# Altium PCB NewSpeedRadar_Board.PcbDoc (part 3 of 4)
Units mm, origin at the board's own origin, x right, y up, seen from the top; angles counter-clockwise.
Board outline 150 x 110 mm, 2 copper layers (Top Layer, Bottom Layer), stack 1.571 mm thick; 208 components, 164 nets, 788 pads, 782 vias.
Unrouted connection lines stored in the file: 231.
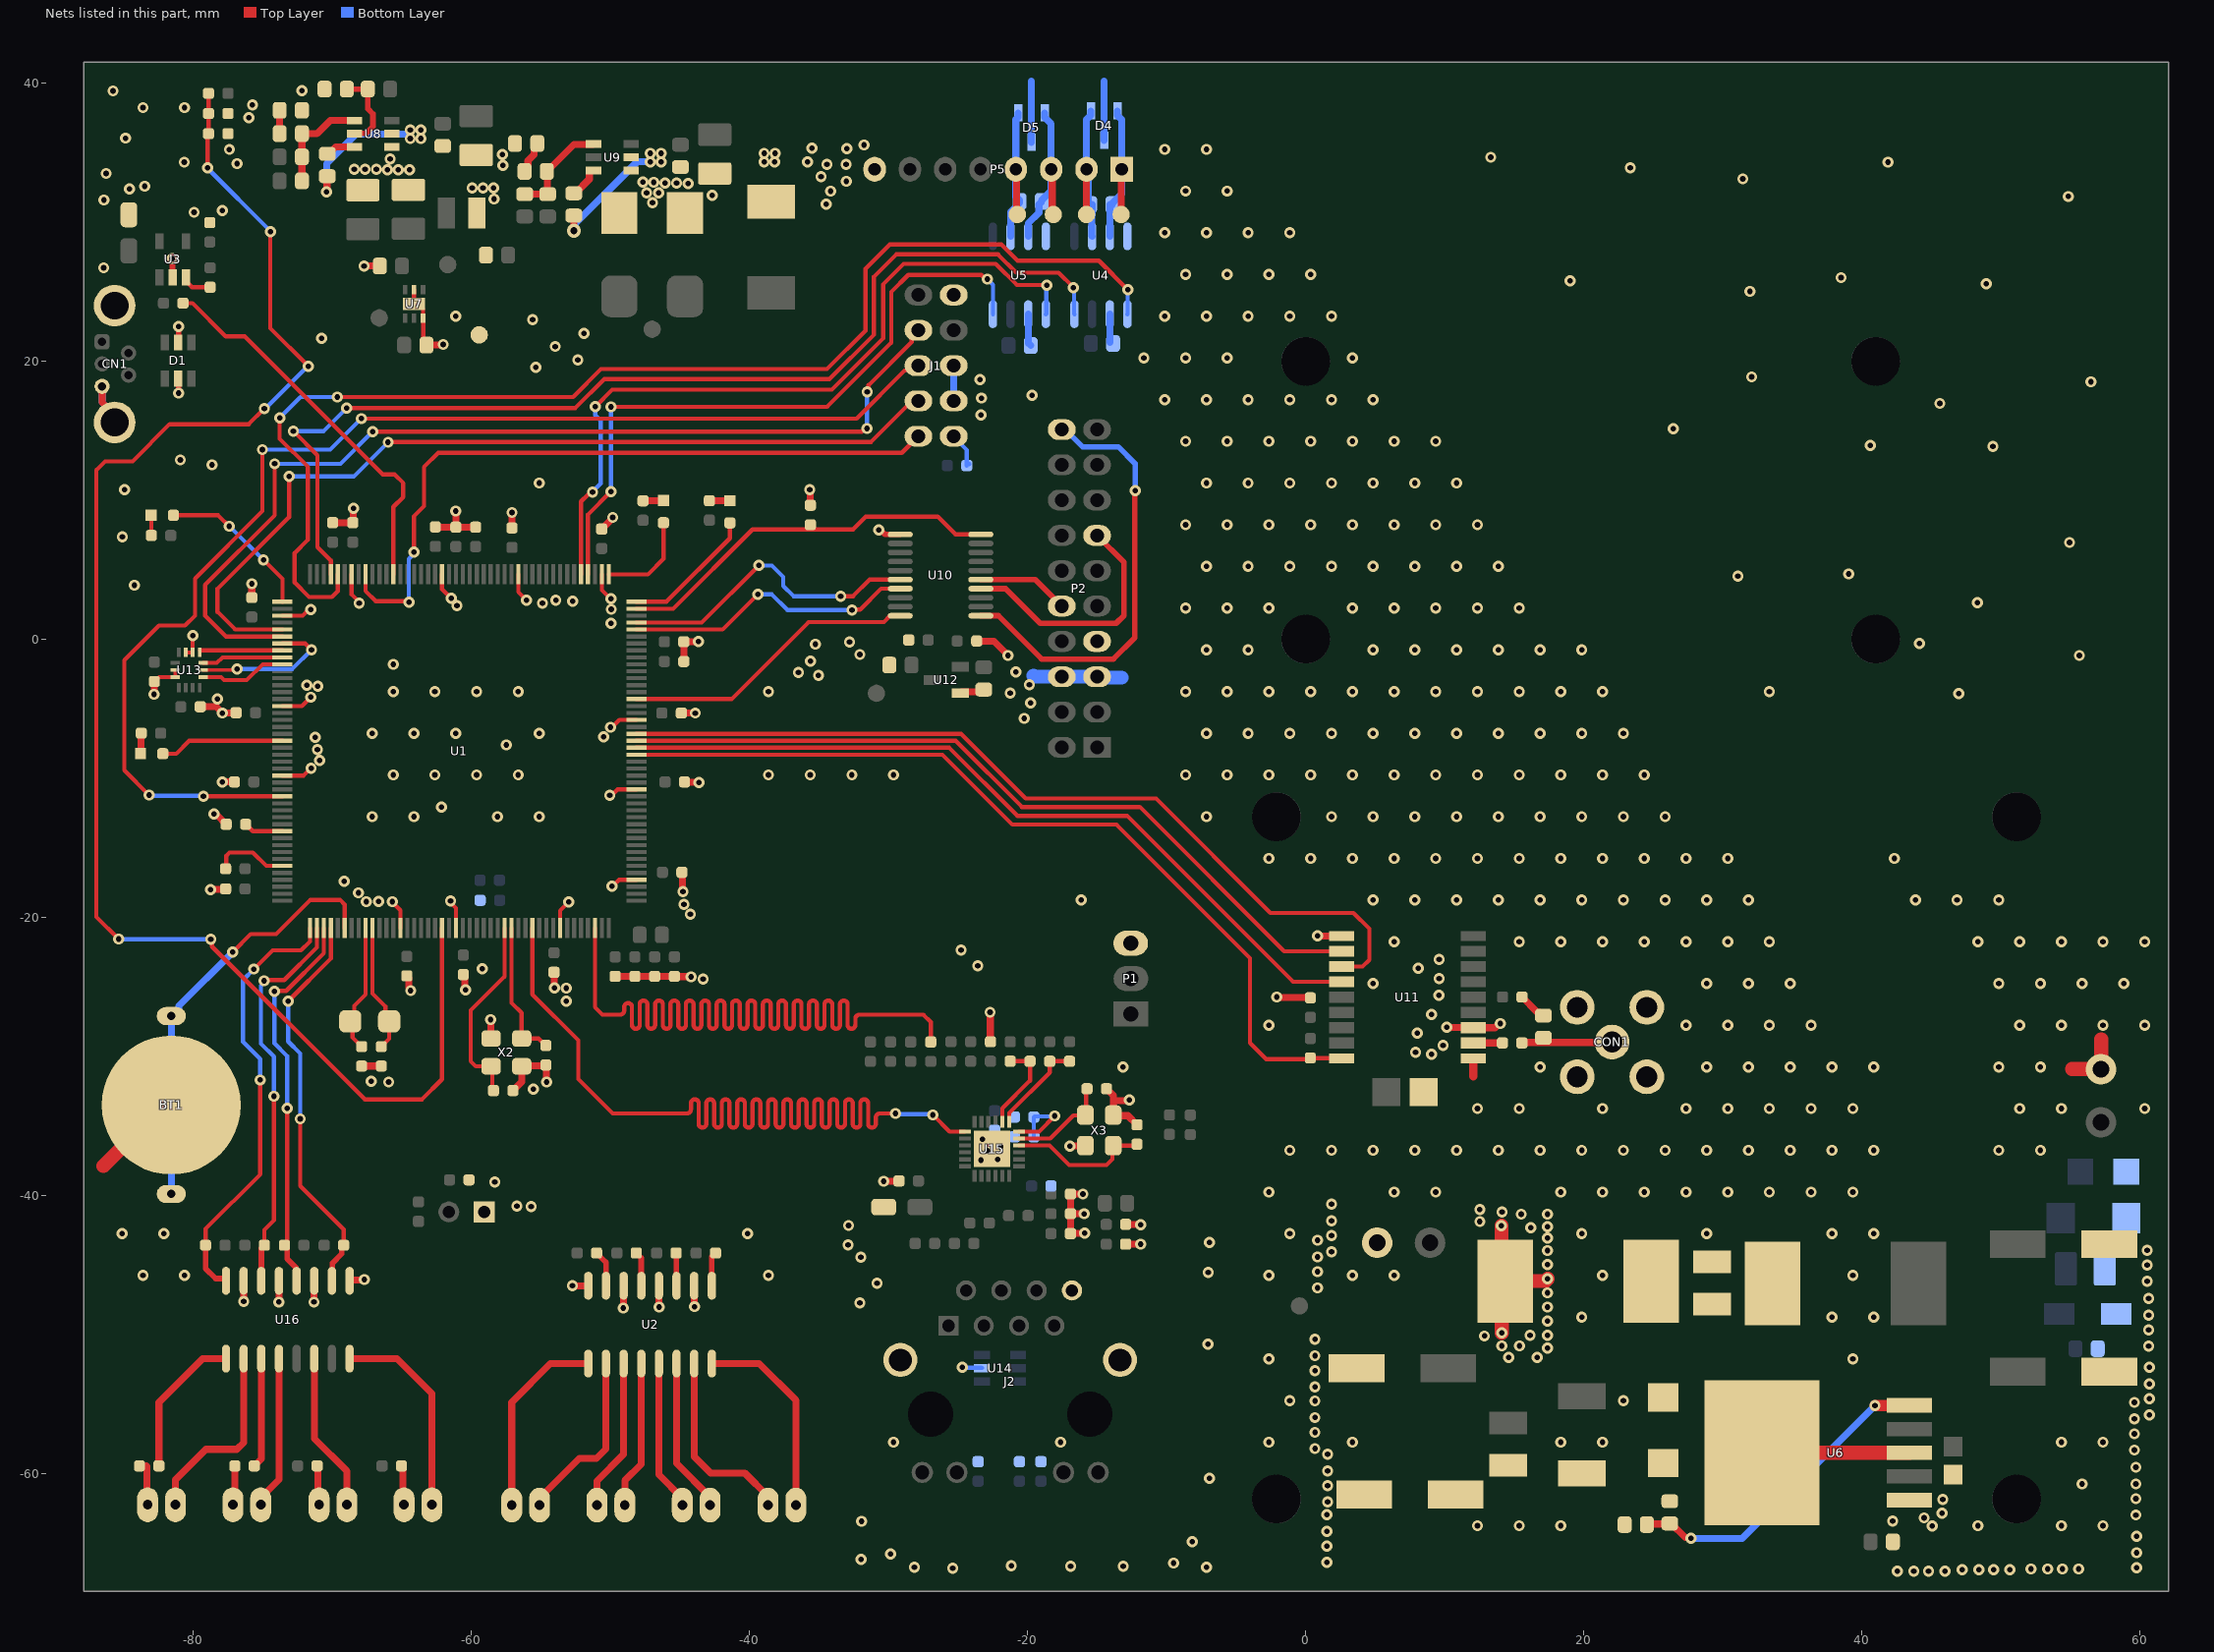
[diagram p2: the nets of this part, all layers, seen from the top]

## Via types
v1: diameter 0.8, hole 0.4, Top Layer to Bottom Layer, tented both sides, 480 vias
v2: diameter 0.8, hole 0.4, Top Layer to Bottom Layer, 288 vias
v3: diameter 1, hole 0.5, Top Layer to Bottom Layer, tented both sides, 14 vias

## Nets (pads, with @x,y where several pads share a name; then routed paths per layer and width w, separated by ;. In a path a pad name is that pad's centre, name@x,y a point inside that pad or via, vN(x,y) a via of type N, cw(c..) or ccw(c..) an arc to the next point about the centre after c; other vN are vias at no path point) (continued)
ADC_Vin: C63.2 R38.2 R39.2 U1.20 | length 115.2
  Top Layer w0.3: v1(-85.383,-21.567) -86.983,-19.967 -86.983,12.166 -86.349,12.799 -84.381,12.799 -81.714,15.466 -76.025,15.466 v1(-74.905,16.586) ; v1(-78.982,33.921) -78.982,36.308 C63.2@-78.92,36.37 R39.2@-78.92,37.818 R38.2@-78.92,39.266 ; v1(-78.753,-21.593) -78.668,-21.678 -78.668,-22.109 -67.679,-33.099 -63.564,-33.099 -62.122,-31.656 U1.20@-62.122,-20.779 ; v1(-74.473,29.312) -74.473,22.377 v1(-71.73,19.634)
  Bottom Layer w0.3: v1(-85.383,-21.567) -85.37,-21.58 -78.766,-21.58 v1(-78.753,-21.593) ; v1(-78.982,33.921) -78.982,33.871 -74.473,29.361 v1(-74.473,29.312) ; v1(-74.905,16.586) -74.841,16.586 -71.793,19.634 v1(-71.73,19.634)
BOOT0: R3.1 U1.166 | length 2.9
  Top Layer w0.3: R3.1@-76.25,-13.312 -76.223,-13.312 -75.73,-13.804 U1.166@-73.597,-13.804
CAN1_H: D4.2 P5.1 R18.2 TP6.1 U4.7 | length 13.5
  Top Layer w0.5: TP6.1@-13.272,30.554 -13.272,33.754 P5.1@-13.221,33.805
  Bottom Layer w0.5: U4.7@-14.085,28.982 -14.066,29.001 -14.066,31.094 R18.2@-13.894,31.265 -13.894,31.365 -13.221,32.038 P5.1@-13.221,33.805 -13.221,37.373 -13.541,37.693 D4.2@-13.541,38.008 ; -14.085,30.509 R18.2@-14.085,31.265
CAN1_L: D4.1 P5.2 R18.1 TP7.1 U4.6 | length 13.3
  Top Layer w0.5: TP7.1@-15.761,30.554 P5.2@-15.761,33.805
  Bottom Layer w0.5: D4.1@-15.441,38.008 -15.441,37.693 -15.761,37.373 P5.2@-15.761,33.805 -15.628,33.671 -15.628,31.398 R18.1@-15.494,31.265 -15.374,31.144 -15.374,29.001 U4.6@-15.355,28.982 ; -15.355,30.509 R18.1@-15.355,31.265
CAN1_RXD: U1.129 U4.4 | length 78.2
  Top Layer w0.3: v1(-72.822,14.971) -71.082,13.231 -71.082,6.627 -70.122,5.666 U1.129@-70.122,4.671 ; v1(-68.974,16.634) -52.53,16.634 -50.447,18.717 -34.252,18.717 -31.052,21.918 -31.052,26.083 -29.452,27.683 -22.124,27.683 -20.803,26.363 -17.768,26.363 v1(-16.701,25.296)
  Bottom Layer w0.3: v1(-72.822,14.971) -70.638,14.971 v1(-68.974,16.634) ; v1(-16.701,25.296) -16.663,25.258 -16.663,23.42 U4.4@-16.625,23.382
CAN1_TXD: U1.128 U4.1 | length 89.9
  Top Layer w0.3: v1(-73.8,15.923) -73.8,14.425 -71.768,12.393 -71.768,7.16 -72.734,6.194 -72.734,4.088 -71.692,3.045 -70.041,3.045 -69.622,3.465 U1.128@-69.622,4.671 ; v1(-69.66,17.422) -52.693,17.422 -50.686,19.428 -34.43,19.428 -31.662,22.197 -31.662,26.642 -29.909,28.395 -21.883,28.395 -20.714,27.226 -14.872,27.226 v1(-12.789,25.143)
  Bottom Layer w0.3: v1(-73.8,15.923) -72.302,17.422 v1(-69.66,17.422) ; U4.1@-12.815,23.382 -12.802,23.395 -12.802,25.131 v1(-12.789,25.143)
CAN2_H: D5.2 P5.3 R22.2 TP8.1 U5.7 | length 13.1
  Top Layer w0.5: P5.3@-18.301,33.805 -18.225,33.729 -18.225,30.63 TP8.1@-18.149,30.554
  Bottom Layer w0.5: U5.7@-19.952,28.985 -19.933,29.004 -19.933,29.938 -19.183,30.688 -19.183,31.285 R22.2@-18.974,31.493 -18.974,31.593 -18.301,32.267 P5.3@-18.301,33.805 -18.301,37.075 -18.774,37.547 D5.2@-18.774,37.862
CAN2_L: D5.1 P5.4 R22.1 TP9.1 U5.6 | length 12.6
  Top Layer w0.5: P5.4@-20.841,33.805 -20.79,33.754 -20.79,30.604 TP9.1@-20.74,30.554
  Bottom Layer w0.5: U5.6@-21.222,28.985 -21.222,30.746 -20.574,31.393 R22.1@-20.574,31.493 -20.574,31.593 -20.841,31.86 P5.4@-20.841,33.805 -20.841,37.379 -20.674,37.547 D5.1@-20.674,37.862
CAN2_RXD: U1.92 U5.4 | length 48.7
  Top Layer w0.3: U1.92@-51.622,4.671 -51.622,8.968 v1(-49.975,10.615) ; v1(-49.975,16.719) -34.422,16.719 -29.807,21.333 -29.807,24.991 -28.588,26.21 -23.324,26.21 -23.019,25.905 v1(-22.899,25.905)
  Bottom Layer w0.3: v1(-49.975,10.615) v1(-49.975,16.719) ; v1(-22.899,25.905) -22.492,25.499 U5.4@-22.492,23.382
CAN2_TXD: U1.93 U5.1 | length 54.7
  Top Layer w0.3: U1.93@-52.122,4.671 -52.122,9.912 -51.909,10.124 -51.896,10.124 -51.431,10.589 v1(-51.296,10.589) ; v1(-51.093,16.736) -49.873,17.955 -34.075,17.955 -30.392,21.638 -30.392,25.524 -28.918,26.998 -22.289,26.998 -20.765,25.474 v1(-18.606,25.474)
  Bottom Layer w0.3: v1(-51.296,10.589) -51.296,10.623 -50.712,11.207 -50.712,15.736 -51.093,16.117 v1(-51.093,16.736) ; U5.1@-18.682,23.382 -18.644,23.42 -18.644,25.436 v1(-18.606,25.474)
ETH_MDC: U1.33 U15.13 | length 84.4
  Top Layer w0.3: U1.33@-55.622,-20.779 -55.622,-25.547 -52.324,-28.844 -52.324,-31.638 -49.848,-34.115 -45.86,-34.115 -44.514,-34.115 ccw(c-44.514,-33.815) -44.214,-33.815 -44.214,-33.376 cw(c-43.937,-33.376) -43.66,-33.376 -43.66,-34.854 ccw(c-43.383,-34.854) -43.106,-34.854 -43.106,-33.376 cw(c-42.829,-33.376) -42.552,-33.376 -42.552,-34.854 ccw(c-42.275,-34.854) -41.998,-34.854 -41.998,-33.376 cw(c-41.721,-33.376) -41.444,-33.376 -41.444,-34.854 ccw(c-41.167,-34.854) -40.89,-34.854 -40.89,-33.376 cw(c-40.613,-33.376) -40.336,-33.376 -40.336,-34.854 ccw(c-40.059,-34.854) -39.782,-34.854 -39.782,-33.376 cw(c-39.505,-33.376) -39.228,-33.376 -39.228,-34.854 ccw(c-38.951,-34.854) -38.674,-34.854 -38.674,-33.376 cw(c-38.397,-33.376) -38.12,-33.376 -38.12,-34.854 ccw(c-37.843,-34.854) -37.566,-34.854 -37.566,-33.376 cw(c-37.289,-33.376) -37.012,-33.376 -37.012,-34.854 ccw(c-36.735,-34.854) -36.458,-34.854 -36.458,-33.376 cw(c-36.181,-33.376) -35.904,-33.376 -35.904,-34.854 ccw(c-35.627,-34.854) -35.35,-34.854 -35.35,-33.376 cw(c-35.073,-33.376) -34.796,-33.376 -34.796,-34.854 ccw(c-34.519,-34.854) -34.242,-34.854 -34.242,-33.376 cw(c-33.965,-33.376) -33.688,-33.376 -33.688,-34.854 ccw(c-33.411,-34.854) -33.134,-34.854 -33.134,-33.376 cw(c-32.857,-33.376) -32.58,-33.376 -32.58,-34.854 ccw(c-32.303,-34.854) -32.026,-34.854 -32.026,-33.376 cw(c-31.749,-33.376) -31.472,-33.376 -31.472,-34.854 ccw(c-31.195,-34.854) -30.918,-34.854 -30.918,-34.415 cw(c-30.618,-34.415) -30.618,-34.115 -30.468,-34.115 v1(-29.503,-34.115) ; v1(-26.81,-34.216) -25.616,-35.411 U15.13@-24.514,-35.411
  Bottom Layer w0.3: v1@-29.503,-34.166 -26.861,-34.166 v1(-26.81,-34.216)
ETH_MDIO: R57.2 U1.42 | length 84.9
  Top Layer w0.3: U1.42@-51.122,-20.779 -51.122,-26.466 -50.585,-27.003 -49.311,-27.003 ccw(c-49.311,-26.703) -49.011,-26.703 -49.011,-26.453 cw(c-48.734,-26.453) -48.457,-26.453 -48.457,-27.742 ccw(c-48.18,-27.742) -47.903,-27.742 -47.903,-26.264 cw(c-47.626,-26.264) -47.349,-26.264 -47.349,-27.742 ccw(c-47.072,-27.742) -46.795,-27.742 -46.795,-26.264 cw(c-46.518,-26.264) -46.241,-26.264 -46.241,-27.742 ccw(c-45.964,-27.742) -45.687,-27.742 -45.687,-26.264 cw(c-45.41,-26.264) -45.133,-26.264 -45.133,-27.742 ccw(c-44.856,-27.742) -44.579,-27.742 -44.579,-26.264 cw(c-44.302,-26.264) -44.025,-26.264 -44.025,-27.742 ccw(c-43.748,-27.742) -43.471,-27.742 -43.471,-26.264 cw(c-43.194,-26.264) -42.917,-26.264 -42.917,-27.742 ccw(c-42.64,-27.742) -42.363,-27.742 -42.363,-26.264 cw(c-42.086,-26.264) -41.809,-26.264 -41.809,-27.742 ccw(c-41.532,-27.742) -41.255,-27.742 -41.255,-26.264 cw(c-40.978,-26.264) -40.701,-26.264 -40.701,-27.742 ccw(c-40.424,-27.742) -40.147,-27.742 -40.147,-26.264 cw(c-39.87,-26.264) -39.593,-26.264 -39.593,-27.742 ccw(c-39.316,-27.742) -39.039,-27.742 -39.039,-26.264 cw(c-38.762,-26.264) -38.485,-26.264 -38.485,-27.742 ccw(c-38.208,-27.742) -37.931,-27.742 -37.931,-26.264 cw(c-37.654,-26.264) -37.377,-26.264 -37.377,-27.742 ccw(c-37.1,-27.742) -36.823,-27.742 -36.823,-26.264 cw(c-36.546,-26.264) -36.269,-26.264 -36.269,-27.742 ccw(c-35.992,-27.742) -35.715,-27.742 -35.715,-26.264 cw(c-35.438,-26.264) -35.161,-26.264 -35.161,-27.742 ccw(c-34.884,-27.742) -34.607,-27.742 -34.607,-26.264 cw(c-34.33,-26.264) -34.053,-26.264 -34.053,-27.742 ccw(c-33.776,-27.742) -33.499,-27.742 -33.499,-26.264 cw(c-33.222,-26.264) -32.945,-26.264 -32.945,-27.742 ccw(c-32.668,-27.742) -32.391,-27.742 -32.391,-27.303 cw(c-32.091,-27.303) -32.091,-27.003 -31.941,-27.003 -27.496,-27.003 -26.963,-27.536 R57.2@-26.963,-28.97
GND: BT1.2 C1.2 C2.2 C3.2 C4.1 C5.1 C6.2 C7.2 C8.1 C9.1 C10.1 C11.1 C12.1 C13.1 C14.2 C15.2 C16.2 C17.2 C18.2 C19.2 C20.2 C21.2 C22.2 C23.2 C24.2 C25.2 C26.2 C27.2 C28.2 C29.2 C30.1 C31.1 C32.1 C35.2 C36.2 C37.2 C38.1 C39.1 C41.1 C42.1 C43.1 C44.1 C45.1 C46.1 C47.2 C50.1 C51.1 C52.2 C54.2 C55.2 C56.2 C58.2 C59.2 C60.1 C61.1 C62.1 C63.1 C64.1 C65.1 C66.1 C67.1 C68.1 C69.1 C70.1 C71.1 C72.2 C73.2 C74.2 C75.1 C76.1 C77.2 CN1.5 CN1.Shell CON1.2 CON1.3 CON1.4 CON1.5 D1.2 D1.5 D3.2 D4.3 D5.3 GND.1 J1.3 J1.5 J1.9 J2.8 J2.13 J2.14 L4.2 NTC1.1 P1.3 P2.5 P2.6 P3.2 P5.8 P6.2 R3.2 R5.2 R13.2 R15.2 R19.2 R20.2 R24.2 R30.2 R39.1 R41.1 R42.1 R43.1 R53.2 R54.2 R58.2 U1.14 U1.22 U1.37 U1.48 U1.61 U1.71 U1.90 U1.102 U1.113 U1.126 U1.135 U1.148 U1.158 U2.2 U2.4 U2.6 U2.8 U3.2 U4.2 U4.8 U5.2 U5.8 U6.1 U7.3 U7.5 U7.7 U8.1 U9.1 U10.11 U11.1 U11.10 U11.12 U12.1 U13.2 U13.3 U13.6 U13.7 U14.2 U15.25 U16.9 U16.11 U16.13 U16.15 X2.2 X2.4 X3.2 X3.4 | length 178.1
  Top Layer w0.28: C65.1@-82.817,-3.039 -82.785,-3.039 -82.458,-2.712 U13.7@-81.315,-2.712 U13.6@-81.315,-2.212 ; U13.3@-80.552,-0.95 U13.2@-80.053,-0.95 -80.053,0.247 v1(-80.049,0.251) ; v1@-71.706,2.131 v1(-71.565,2.131) ; v1(-68.085,2.588) v1@-68.085,2.675 ; v1(-56.046,2.817) v1@-56.046,2.825 ; v1(-50.051,-11.229) v1@-49.91,-11.229 ; v1(-50,-6.327) v1@-49.886,-6.327 ; v1(-49.899,-17.757) v1@-49.834,-17.757
  Top Layer w0.3: U1.158@-73.597,-9.804 -72.07,-9.804 v1(-71.54,-9.274) ; U1.148@-73.597,-4.804 -72.201,-4.804 v1(-71.565,-4.168) ; U1.135@-73.597,1.696 -72.141,1.696 v1@-71.706,2.131 ; U1.126@-68.622,4.671 -68.622,3.212 v1@-68.085,2.675 ; v1(-65.698,-18.875) -65.698,-18.925 -65.122,-19.501 U1.14@-65.122,-20.779 ; U7.5@-64.138,25.143 U7.7@-64.138,24.118 -63.838,24.118 -63.488,23.768 U7.3@-63.488,23.093 -63.478,23.083 -63.478,21.387 C41.1@-63.247,21.156 ; U1.113@-62.122,4.671 -62.122,3.61 v1(-61.456,2.944) ; v1(-61.507,-18.824) -61.507,-18.959 -61.122,-19.344 U1.22@-61.122,-20.779 ; U1.102@-56.622,4.671 -56.622,3.401 v1@-56.046,2.825 ; U1.37@-53.622,-20.779 -53.622,-19.524 v1(-52.998,-18.9) ; U1.90@-50.622,4.671 -50.622,3.526 -50.014,2.918 v1(-49.975,2.918) ; v1@-49.91,-11.229 -49.485,-10.804 U1.61@-48.147,-10.804 ; v1@-49.886,-6.327 -49.363,-5.804 U1.71@-48.147,-5.804 ; v1@-49.834,-17.757 -49.381,-17.304 U1.48@-48.147,-17.304
  Top Layer w0.4: v1(-81.522,27.379) -81.509,27.366 -81.509,26.045 U3.2@-81.496,26.032 ; D1.2@-81.1,18.743 -81.082,18.725 -81.082,17.719 v1(-81.065,17.701) ; D1.5@-81.1,21.343 -81.082,21.36 -81.082,22.484 v1(-81.065,22.502) ; v1@-77.966,30.836 v1(-77.927,30.836) ; v1(-30.696,7.871) -30.588,7.871 -30.255,7.538 U10.11@-29.162,7.538
  Top Layer w0.5: CN1.5@-86.57,18.197 -86.57,17.045 -85.67,16.145 CN1.Shell@-85.67,15.597 ; v1(-82.843,-3.965) -82.83,-3.952 -82.83,-3.052 C65.1@-82.817,-3.039 ; C64.1@-79.512,-4.854 -78.372,-4.854 v1(-77.915,-5.311) -77.902,-5.298 -76.951,-5.298 C25.2@-76.939,-5.286 ; v1(-78.779,-18.011) -78.753,-17.986 -77.715,-17.986 C24.2@-77.689,-17.96 ; v1(-78.525,-12.576) -78.467,-12.633 -78.329,-12.633 R3.2@-77.65,-13.312 ; v1(-77.915,-10.264) C23.2@-77.054,-10.264 ; v1(-76.391,-47.628) U16.15@-76.391,-46.148 ; C26.2@-75.807,2.998 v1(-75.807,3.985) ; v1(-73.851,-47.678) U16.13@-73.851,-46.148 ; v1(-71.336,-47.678) -71.324,-47.666 -71.324,-46.161 U16.11@-71.311,-46.148 ; C27.2@-69.99,8.382 C2.2@-68.542,8.382 -68.517,8.408 -68.517,9.395 v1(-68.492,9.421) ; U16.9@-68.771,-46.148 -68.771,-46.147 -68.725,-46.101 -67.752,-46.101 v1(-67.704,-46.053) ; C1.2@-67.907,-30.7 C3.2@-66.485,-30.7 ; v1(-67.73,26.845) C42.1@-66.599,26.845 ; v1@-66.021,-31.794 v1(-65.964,-31.852) ; C28.2@-64.656,-24.212 -64.506,-24.362 -64.506,-25.065 -64.377,-25.194 v1(-64.377,-25.276) ; C41.1@-63.247,21.156 -63.221,21.181 -62.065,21.181 v1(-62.04,21.206) ; C17.2@-62.599,8.078 -62.592,8.071 C4.1@-61.126,8.071 ; C4.1@-61.126,8.063 C4.1@-61.126,8.071 ; v1(-61.126,9.218) C4.1@-61.126,8.071 ; C19.2@-60.592,-24.121 -60.497,-24.216 -60.497,-25.167 v1(-60.44,-25.225) ; C5.1@-59.703,8.063 -59.71,8.071 C4.1@-61.126,8.071 ; R24.2@-58.966,27.963 R24.2@-58.852,27.963 ; v1(-58.636,-27.358) -58.615,-27.38 -58.615,-28.699 X2.4@-58.593,-28.721 ; C18.2@-57.087,8.001 v1(-57.087,9.116) ; C6.2@-57.022,-32.464 -56.393,-31.835 X2.2@-56.393,-30.721 -56.345,-30.672 -54.697,-30.672 C7.2@-54.649,-30.624 -54.623,-30.649 -54.623,-31.829 v1(-54.598,-31.854) ; C14.2@-54.064,-23.955 -54.052,-23.967 -54.052,-25.06 v1(-54.039,-25.072) ; v1(-52.744,-46.51) -52.741,-46.507 -51.604,-46.507 U2.8@-51.601,-46.504 ; C16.2@-50.635,7.925 -49.848,8.713 v1(-49.848,8.76) ; C8.1@-49.67,-24.248 C9.1@-48.248,-24.248 C11.1@-46.825,-24.248 C10.1@-45.403,-24.248 -45.385,-24.267 -44.227,-24.267 v1(-44.209,-24.285) ; v1(-49.086,-48.11) -49.073,-48.097 -49.073,-46.517 U2.6@-49.061,-46.504 ; U2.4@-46.521,-46.504 -46.508,-46.517 -46.508,-48.021 v1(-46.495,-48.034) ; C15.2@-44.906,-5.311 v1(-43.904,-5.311) ; C20.2@-44.867,-16.767 -44.83,-16.803 -44.83,-18.127 v1(-44.793,-18.164) ; C12.1@-44.728,-1.603 C22.2@-44.728,-0.18 -44.716,-0.168 -43.688,-0.168 v1(-43.676,-0.155) ; C21.2@-44.678,-10.264 -44.652,-10.29 -43.676,-10.29 v1(-43.65,-10.315) ; U2.2@-43.981,-46.504 -43.968,-46.517 -43.968,-47.996 v1(-43.955,-48.009) ; v1(-35.675,10.767) -35.649,10.742 -35.649,9.664 R41.1@-35.624,9.638 ; v1(-30.341,-38.992) -30.328,-38.979 -29.261,-38.979 C70.1@-29.249,-38.966 ; U12.1@-24.845,-3.874 -24.745,-3.774 -23.304,-3.774 C60.1@-23.165,-3.635 ; C58.2@-23.661,-0.13 -23.536,-0.13 -23.511,-0.155 -22.416,-0.155 v1(-21.4,-1.171) ; v1(-22.695,-26.825) -22.683,-26.838 -22.683,-28.943 R53.2@-22.67,-28.956 ; v1(-16.955,-36.452) -16.942,-36.439 -15.85,-36.439 X3.2@-15.837,-36.426 ; v1(-16.015,-39.906) C71.1@-16.915,-39.906 C76.1@-16.915,-41.328 ; v1(-15.939,-41.328) C76.1@-16.915,-41.328 ; v1(-15.888,-42.725) -15.901,-42.738 -16.903,-42.738 C75.1@-16.915,-42.751 C76.1@-16.915,-41.328 ; C77.2@-14.325,-32.337 -13.837,-32.824 -13.837,-33.2 ; C67.1@-12.94,-43.513 v1(-11.875,-43.513) ; C66.1@-12.94,-42.09 -12.928,-42.103 -11.888,-42.103 v1(-11.875,-42.116) ; v1(-12.688,-33.15) -12.739,-33.2 -13.837,-33.2 ; C73.2@-12.129,-34.925 -12.784,-34.269 -13.794,-34.269 X3.4@-13.837,-34.226 -13.837,-33.2 ; v1(-2.072,-25.734) -2.041,-25.765 0.31,-25.765 C56.2@0.341,-25.796 ; v1(0.849,-21.34) 0.851,-21.342 2.574,-21.342 U11.1@2.576,-21.344 ; v1(10.145,-27.919) 10.158,-27.931 12.063,-27.931 U11.12@12.076,-27.944 13.62,-27.944 13.925,-27.639 v1(14.006,-27.639)
  Top Layer w0.6: 12.05,-31.449 12.076,-31.424 U11.10@12.076,-30.144
  Top Layer w1: -86.475,-37.899 -82.081,-33.505 BT1.2@-81.598,-33.505 ; v1(14.084,-42.192) 14.084,-45.91 L4.2@14.353,-46.18 14.109,-46.424 v1(14.109,-49.888) ; L4.2@15.073,-46.154 17.259,-46.154 v1(17.411,-46.002) ; 55.129,-30.914 P3.2@57.211,-30.914 ; P3.2@57.211,-30.94 57.237,-30.914 57.237,-28.781
  Bottom Layer w0.3: v1(-24.704,-52.366) -24.673,-52.397 -23.315,-52.397 U14.2@-23.284,-52.428
  Bottom Layer w0.5: CN1.5@-86.57,18.197 -86.57,17.045 -85.67,16.145 CN1.Shell@-85.67,15.597 ; J1.3@-25.312,17.142 J1.5@-25.312,19.682 ; U5.2@-19.952,23.385 -19.933,23.366 -19.933,21.289 C39.1@-19.775,21.13 ; D5.3@-19.724,35.742 -19.724,40.155 ; D4.3@-14.491,35.888 -14.491,40.129 ; U4.2@-14.085,23.382 -14.066,23.363 C32.1@-14.066,21.352
  Bottom Layer w1: -19.571,-2.619 -19.495,-2.695 P2.6@-17.539,-2.695 P2.5@-14.999,-2.695 -14.923,-2.771 -13.247,-2.771
  other v1: 42.556,-67.033 43.749,-67.033 44.816,-67.033 45.985,-67.033 47.229,-66.932 48.423,-66.932 49.49,-66.932 50.658,-66.932 52.182,-66.881 53.376,-66.881 54.443,-66.881 55.611,-66.881 -25.389,-66.83 59.777,-66.779 -16.906,-66.678 -13.121,-66.678 -21.173,-66.652 -9.489,-66.449 1.535,-66.398 -31.968,-66.195 -29.86,-65.789 59.777,-65.712 1.535,-65.23 -8.143,-64.925 59.777,-64.519 1.535,-64.163 45.072,-63.782 -31.943,-63.452 42.227,-63.426 44.488,-63.198 59.726,-62.995 1.535,-62.969 45.783,-62.868 1.585,-62.055 45.834,-61.877 59.726,-61.826 1.585,-60.886 59.726,-60.759 -6.924,-60.353 1.585,-59.82 59.726,-59.566 1.585,-58.626 59.624,-58.321 0.671,-58.219 59.624,-57.153 0.671,-57.051 59.624,-56.086 0.671,-55.984 60.691,-55.806 59.624,-54.892 0.671,-54.79 60.691,-54.638 0.671,-53.774 60.691,-53.571 0.671,-52.606 60.691,-52.377 14.617,-51.666 16.649,-51.666 0.671,-51.539 17.41,-50.98 60.64,-50.853 14.109,-50.828 15.379,-50.828 -7.025,-50.701 0.671,-50.345 12.865,-50.117 16.141,-50.066 17.411,-50.066 60.64,-49.685 17.411,-49.05 60.64,-48.618 17.411,-48.034 -32.07,-47.729 60.64,-47.424 17.411,-47.018 0.849,-46.662 -30.825,-46.332 60.539,-46.18 -7,-45.545 0.849,-45.494 60.539,-45.011 17.411,-44.986 -31.993,-44.453 0.849,-44.427 1.865,-44.072 17.411,-43.97 60.539,-43.945 -32.908,-43.564 -6.924,-43.386 0.849,-43.233 17.411,-43.081 1.865,-42.903 16.192,-42.319 17.411,-42.268 -32.882,-42.167 12.534,-41.887 1.865,-41.836 15.506,-41.354 17.41,-41.354 14.135,-41.201 12.534,-41.024 -55.715,-40.82 -56.731,-40.77 1.865,-40.643 -58.332,-39.042 -23.356,-37.468 -22.162,-37.417 -22.899,-36.782 -21.959,-36.502 -23.254,-35.969 -55.55,-32.36 -67.208,-31.801 9.053,-29.849 7.91,-29.722 9.891,-29.214 8.037,-28.325 9.053,-26.979 -53.175,-26.038 9.586,-25.607 -53.175,-25.098 -43.346,-24.437 9.612,-24.414 -59.221,-23.701 8.113,-23.677 -23.586,-23.498 9.612,-23.042 -24.78,-22.355 -44.26,-19.789 -44.717,-19.078 -67.577,-18.875 -66.688,-18.849 -68.136,-18.24 -69.152,-17.402 -62.167,-12.068 -70.93,-8.715 -71.082,-7.927 -57.493,-7.597 -71.235,-7.064 -50.508,-7.013 -20.232,-5.692 -19.774,-4.575 -78.283,-4.293 46.975,-3.914 -21.248,-3.863 -71.057,-3.381 -71.844,-3.305 -19.876,-3.279 -35.04,-2.593 -36.488,-2.39 -20.841,-2.365 -65.621,-1.806 -35.624,-1.577 55.662,-1.171 -32.068,-1.095 -35.268,-0.358 44.156,-0.307 -32.805,-0.206 -49.975,1.14 -49.95,2.156 -61.049,2.41 -54.903,2.588 48.321,2.639 -52.718,2.741 -53.937,2.817 -84.252,3.886 31.1,4.544 39.076,4.696 54.951,6.957 -85.115,7.366 -84.963,10.77 -78.664,12.548 -80.95,12.903 49.439,13.866 40.625,13.942 26.452,15.136 -23.357,16.126 45.629,16.965 -23.307,17.346 -19.674,17.549 56.5,18.514 -23.434,18.666 32.091,18.87 -55.372,19.558 -52.349,20.091 -53.975,21.057 -70.79,21.641 -51.918,21.996 -55.601,22.987 31.964,25.016 48.956,25.575 19.035,25.778 38.517,26.007 -86.462,26.721 -79.959,30.709 -34.481,31.29 -46.978,31.392 -86.436,31.598 54.875,31.849 -42.685,31.925 -47.41,32.103 -46.546,32.103 -34.176,32.23 -84.597,32.382 -83.505,32.586 -44.412,32.789 -46.089,32.814 -45.251,32.814 -46.902,32.865 -47.664,32.89 -33.033,32.941 31.456,33.119 -34.862,33.271 -86.284,33.503 -66.053,33.779 -65.266,33.779 -64.453,33.779 -68.441,33.805 -67.653,33.805 -66.841,33.805 23.353,33.906 -57.747,34.084 -34.43,34.16 -33.059,34.16 -76.86,34.214 -80.67,34.315 41.895,34.313 -35.827,34.338 -65.85,34.541 13.32,34.668 -57.773,34.872 -77.419,35.23 -33.008,35.278 -35.522,35.329 -31.763,35.557 -84.887,36.043 -76.012,37.513 -75.758,38.428 -85.789,39.444 -72.202,39.469
  other v2: -28.136,-66.763 -7.136,-66.763 12.364,-63.763 15.364,-63.763 18.364,-63.763 48.364,-63.763 54.364,-63.763 57.364,-63.763 55.864,-60.763 -29.636,-57.763 -17.636,-57.763 -2.636,-57.763 3.364,-57.763 18.364,-57.763 21.364,-57.763 54.364,-57.763 57.364,-57.763 -1.136,-54.763 22.864,-54.763 -2.636,-51.763 39.364,-51.763 19.864,-48.763 37.864,-48.763 40.864,-48.763 -83.636,-45.763 -80.636,-45.763 -38.636,-45.763 -2.636,-45.763 3.364,-45.763 6.364,-45.763 21.364,-45.763 39.364,-45.763 -85.136,-42.763 -82.136,-42.763 -40.136,-42.763 -1.136,-42.763 19.864,-42.763 28.864,-42.763 37.864,-42.763 40.864,-42.763 -2.636,-39.763 6.364,-39.763 9.364,-39.763 18.364,-39.763 21.364,-39.763 24.364,-39.763 27.364,-39.763 30.364,-39.763 33.364,-39.763 36.364,-39.763 39.364,-39.763 -1.136,-36.763 1.864,-36.763 4.864,-36.763 7.864,-36.763 10.864,-36.763 13.864,-36.763 16.864,-36.763 19.864,-36.763 22.864,-36.763 25.864,-36.763 28.864,-36.763 31.864,-36.763 34.864,-36.763 37.864,-36.763 40.864,-36.763 49.864,-36.763 52.864,-36.763 12.364,-33.763 15.364,-33.763 21.364,-33.763 27.364,-33.763 30.364,-33.763 33.364,-33.763 36.364,-33.763 39.364,-33.763 51.364,-33.763 54.364,-33.763 60.364,-33.763 -13.136,-30.763 16.864,-30.763 28.864,-30.763 31.864,-30.763 34.864,-30.763 37.864,-30.763 40.864,-30.763 49.864,-30.763 52.864,-30.763 -2.636,-27.763 27.364,-27.763 30.364,-27.763 33.364,-27.763 36.364,-27.763 51.364,-27.763 54.364,-27.763 57.364,-27.763 60.364,-27.763 4.864,-24.763 28.864,-24.763 31.864,-24.763 34.864,-24.763 49.864,-24.763 52.864,-24.763 55.864,-24.763 58.864,-24.763 6.364,-21.763 15.364,-21.763 18.364,-21.763 21.364,-21.763 24.364,-21.763 27.364,-21.763 30.364,-21.763 33.364,-21.763 48.364,-21.763 51.364,-21.763 54.364,-21.763 57.364,-21.763 60.364,-21.763 -16.136,-18.763 4.864,-18.763 7.864,-18.763 10.864,-18.763 13.864,-18.763 16.864,-18.763 19.864,-18.763 22.864,-18.763 25.864,-18.763 28.864,-18.763 31.864,-18.763 43.864,-18.763 46.864,-18.763 49.864,-18.763 -2.636,-15.763 0.364,-15.763 3.364,-15.763 6.364,-15.763 9.364,-15.763 12.364,-15.763 15.364,-15.763 18.364,-15.763 21.364,-15.763 24.364,-15.763 27.364,-15.763 30.364,-15.763 42.364,-15.763 -67.136,-12.763 -64.136,-12.763 -58.136,-12.763 -55.136,-12.763 -7.136,-12.763 1.864,-12.763 4.864,-12.763 7.864,-12.763 10.864,-12.763 13.864,-12.763 16.864,-12.763 19.864,-12.763 22.864,-12.763 25.864,-12.763 -65.636,-9.763 -62.636,-9.763 -59.636,-9.763 -56.636,-9.763 -38.636,-9.763 -35.636,-9.763 -32.636,-9.763 -29.636,-9.763 -8.636,-9.763 -5.636,-9.763 -2.636,-9.763 0.364,-9.763 3.364,-9.763 6.364,-9.763 9.364,-9.763 12.364,-9.763 15.364,-9.763 18.364,-9.763 21.364,-9.763 24.364,-9.763 -67.136,-6.763 -64.136,-6.763 -61.136,-6.763 -55.136,-6.763 -7.136,-6.763 -4.136,-6.763 -1.136,-6.763 1.864,-6.763 4.864,-6.763 7.864,-6.763 10.864,-6.763 13.864,-6.763 16.864,-6.763 19.864,-6.763 22.864,-6.763 -65.636,-3.763 -62.636,-3.763 -59.636,-3.763 -56.636,-3.763 -38.636,-3.763 -8.636,-3.763 -5.636,-3.763 -2.636,-3.763 0.364,-3.763 3.364,-3.763 6.364,-3.763 9.364,-3.763 12.364,-3.763 15.364,-3.763 18.364,-3.763 21.364,-3.763 33.364,-3.763 -7.136,-0.763 -4.136,-0.763 4.864,-0.763 7.864,-0.763 10.864,-0.763 13.864,-0.763 16.864,-0.763 19.864,-0.763 -8.636,2.237 -5.636,2.237 -2.636,2.237 3.364,2.237 6.364,2.237 9.364,2.237 12.364,2.237 15.364,2.237 -7.136,5.237 -4.136,5.237 -1.136,5.237 1.864,5.237 4.864,5.237 7.864,5.237 10.864,5.237 13.864,5.237 -8.636,8.237 -5.636,8.237 -2.636,8.237 0.364,8.237 3.364,8.237 6.364,8.237 9.364,8.237 12.364,8.237 -55.136,11.237 -7.136,11.237 -4.136,11.237 -1.136,11.237 1.864,11.237 4.864,11.237 7.864,11.237 10.864,11.237 -8.636,14.237 -5.636,14.237 -2.636,14.237 0.364,14.237 3.364,14.237 6.364,14.237 9.364,14.237 -10.136,17.237 -7.136,17.237 -4.136,17.237 -1.136,17.237 1.864,17.237 4.864,17.237 -11.636,20.237 -8.636,20.237 -5.636,20.237 3.364,20.237 -61.136,23.237 -10.136,23.237 -7.136,23.237 -4.136,23.237 -1.136,23.237 1.864,23.237 -8.636,26.237 -5.636,26.237 -2.636,26.237 0.364,26.237 -10.136,29.237 -7.136,29.237 -4.136,29.237 -1.136,29.237 -8.636,32.237 -5.636,32.237 -10.136,35.237 -7.136,35.237 -83.636,38.237 -80.636,38.237
GPIO3_C6_u_1V8: P2.20 U10.1 | length 31.8
  Top Layer w0.4: U10.1@-23.362,1.688 -22.1,1.688 -18.987,-1.425 -13.831,-1.425 -12.281,0.124 -12.281,10.665 v1(-12.256,10.691)
  Bottom Layer w0.4: P2.20@-17.539,15.085 -17.289,15.085 -16.045,13.84 -13.475,13.84 -12.256,12.621 v1(-12.256,10.691)
GPIO3_C6_u_3V3: U1.74 U10.20 | length 21.5
  Top Layer w0.3: U1.74@-48.147,-4.304 -41.297,-4.304 -35.751,1.242 -30.334,1.242 -29.888,1.688 U10.20@-29.162,1.688
GPS_PPS: U1.67 U11.4 | length 57.7
  Top Layer w0.3: U1.67@-48.147,-7.804 -31.972,-7.804 -25.639,-7.804 -20.741,-12.703 -12.842,-12.703 -0.9,-24.644 U11.4@2.576,-24.644
GPS_RESET: R1.1 U1.66 U11.9 | length 63.4
  Top Layer w0.3: U1.66@-48.147,-8.304 -31.765,-8.304 -26.13,-8.304 -21.097,-13.338 -13.604,-13.338 -4.003,-22.939 -4.003,-29.035 -2.834,-30.203 0.255,-30.203 R1.1@0.341,-30.117 0.354,-30.131 2.563,-30.131 U11.9@2.576,-30.144
GPS_RXD: U1.69 U11.3 | length 63
  Top Layer w0.3: U1.69@-48.147,-6.804 -24.785,-6.804 -20.132,-11.458 -10.759,-11.458 -2.529,-19.688 3.44,-19.688 4.583,-20.831 4.583,-23.066 4.1,-23.548 2.58,-23.548 U11.3@2.576,-23.544
GPS_TXD: U1.68 U11.2 | length 57
  Top Layer w0.3: U1.68@-48.147,-7.304 -25.174,-7.304 -20.411,-12.068 -11.927,-12.068 -1.544,-22.451 2.569,-22.451 U11.2@2.576,-22.444
I2C3_SCL_M0_1V8: P2.13 U10.4 | length 18.1
  Top Layer w0.4: U10.4@-23.362,3.638 -21.587,3.638 -19.215,1.267 -19.089,1.14 -13.628,1.14 -13.069,1.699 -13.069,5.535 P2.13@-14.999,7.465
I2C3_SCL_M0_3V3: U1.84 U10.17 | length 21.1
  Top Layer w0.3: U1.84@-48.147,0.696 -41.936,0.696 v1(-39.409,3.223) ; v1(-32.627,2.106) -32.605,2.127 -32.046,2.127 -30.535,3.638 U10.17@-29.162,3.638
  Bottom Layer w0.3: v1(-39.409,3.223) -38.393,3.223 -37.275,2.106 v1(-32.627,2.106)
I2C3_SDA_M0_1V8: P2.10 U10.5 | length 6.6
  Top Layer w0.4: U10.5@-23.362,4.288 -19.443,4.288 P2.10@-17.539,2.385
I2C3_SDA_M0_3V3: U1.85 U10.16 | length 22.5
  Top Layer w0.3: U1.85@-48.147,1.196 -43.443,1.196 v1(-39.332,5.306) ; v1(-33.44,3.096) -32.551,3.096 -31.358,4.288 U10.16@-29.162,4.288
  Bottom Layer w0.3: v1(-39.332,5.306) -38.393,5.306 -37.58,4.493 -37.58,3.833 -36.843,3.096 v1(-33.44,3.096)
Input1: R31.1 U1.1 U16.16 | length 31.7
  Top Layer w0.3: R31.1@-79.134,-43.589 -79.134,-42.421 -75.197,-38.484 v1(-75.197,-31.702) ; v1(-75.654,-23.726) -74.309,-22.381 -72.266,-22.381 -71.622,-21.736 U1.1@-71.622,-20.779
  Top Layer w0.4: R31.1@-79.134,-43.589 -79.134,-45.265 -78.407,-45.993 -77.753,-45.993 -77.661,-46.085 U16.16@-77.661,-46.148
  Bottom Layer w0.3: v1(-75.654,-23.726) -76.442,-24.514 -76.442,-28.959 -75.197,-30.203 v1(-75.197,-31.702)
Input2: R33.1 U1.2 U16.14 | length 28.6
  Top Layer w0.3: v1(-74.918,-24.564) -74.867,-24.514 -73.47,-24.514 -71.122,-22.165 U1.2@-71.122,-20.779 ; R33.1@-74.904,-43.589 -74.904,-42.483 -74.207,-41.786 v1(-74.207,-32.87)
  Top Layer w0.4: U16.14@-75.121,-46.148 -75.121,-43.806 R33.1@-74.904,-43.589
  Bottom Layer w0.3: v1(-74.918,-24.564) -74.918,-24.7 -75.146,-24.928 -75.146,-29.086 -74.207,-30.025 v1(-74.207,-32.87)
Input3: R61.1 U1.3 U16.12 | length 28.1
  Top Layer w0.3: v1(-74.181,-25.326) -74.144,-25.289 -73.331,-25.289 -70.622,-22.58 U1.3@-70.622,-20.779 ; R61.1@-73.459,-43.589 -73.267,-43.397 v1(-73.267,-33.734)
  Top Layer w0.4: R61.1@-73.459,-43.589 -73.259,-43.789 -73.259,-44.562 -72.619,-45.202 -72.619,-46.11 U16.12@-72.581,-46.148
  Bottom Layer w0.3: v1(-74.181,-25.326) -74.181,-29.06 -73.267,-29.975 v1(-73.267,-33.734)
Input4: R63.1 U1.4 U16.10 | length 28.6
  Top Layer w0.3: v1(-73.191,-26.038) -70.122,-22.969 U1.4@-70.122,-20.779 ; v1(-72.327,-34.496) -72.327,-39.322 -69.2,-42.449 R63.1@-69.2,-43.589
  Top Layer w0.4: U16.10@-70.041,-46.148 -70.003,-46.11 -70.003,-44.871 -69.326,-44.194 -69.326,-43.715 R63.1@-69.2,-43.589
  Bottom Layer w0.3: v1(-73.191,-26.038) -73.191,-28.933 -72.327,-29.797 v1(-72.327,-34.496)
JTCK_SWCLK: J1.4 U1.137 | length 64.5
  Top Layer w0.3: U1.137@-73.597,0.696 -77.001,0.696 -78.271,1.966 -78.271,3.63 -73.114,8.786 v1(-73.114,11.707) ; v1@-65.952,14.196 -31.255,14.196 -28.309,17.142 J1.4@-27.852,17.142
  Bottom Layer w0.3: v1(-73.114,11.707) -68.466,11.707 v1(-66.002,14.171)
JTDI: J1.8 U1.138 | length 71.4
  Top Layer w0.3: v1(-74.156,12.621) -74.156,8.913 -79.16,3.909 -79.16,1.694 -77.661,0.196 U1.138@-73.597,0.196 ; v1(-67.12,14.933) -31.924,14.933 -31.695,15.161 v1(-31.56,15.161) ; v1(-31.535,17.803) -31.439,17.899 -31.439,18.28 -28.331,21.387 -28.331,21.743 J1.8@-27.852,22.222
  Bottom Layer w0.3: v1(-74.156,12.621) -69.431,12.621 v1(-67.12,14.933) ; v1(-31.56,15.161) -31.547,15.174 -31.547,17.79 v1(-31.535,17.803)
JTDO-SWO: J1.6 U1.161 | length 90.1
  Top Layer w0.3: v1(-83.198,-11.204) -84.976,-9.426 -84.976,-1.501 -82.487,0.988 -80.607,0.988 -79.896,1.699 -79.896,4.366 -75.045,9.218 v1(-75.045,13.637) ; v1(-79.287,-11.306) -79.285,-11.304 U1.161@-73.597,-11.304 ; v1(-67.933,15.872) -32.297,15.872 -28.843,19.326 -28.782,19.326 -28.426,19.682 J1.6@-27.852,19.682
  Bottom Layer w0.3: v1(-83.198,-11.204) -83.147,-11.255 -79.337,-11.255 v1(-79.287,-11.306) ; v1(-75.045,13.637) -70.168,13.637 v1(-67.933,15.872)
JTMS_SWDIO: J1.2 U1.124 | length 51.3
  Top Layer w0.3: U1.124@-67.622,4.671 -67.622,3.471 -66.891,2.741 -64.58,2.741 v1(-64.504,2.664) ; v1(-64.148,6.271) -64.148,8.837 -63.412,9.573 -63.412,12.393 -62.396,13.409 -29.045,13.409 J1.2@-27.852,14.602
  Bottom Layer w0.3: v1(-64.504,2.664) -64.504,5.78 -64.148,6.136 v1(-64.148,6.271)
LED1: LED1.2 U1.153 | length 9
  Top Layer w0.3: LED1.2@-82.208,-8.232 -81.242,-8.232 -80.315,-7.304 U1.153@-73.597,-7.304
LED2: LED2.2 U1.88 | length 9.7
  Top Layer w0.3: U1.88@-48.147,2.696 -45.981,2.696 -41.415,7.262 LED2.2@-41.415,8.367
LED3: LED3.2 U1.89 | length 7
  Top Layer w0.3: U1.89@-50.122,4.671 -47.308,4.671 -46.19,5.789 LED3.2@-46.19,8.381
LED4: LED4.2 U1.133 | length 11.4
  Top Layer w0.3: LED4.2@-81.446,8.913 -78.22,8.913 v1(-77.432,8.125) ; v1(-74.969,5.712) -73.597,4.34 U1.133@-73.597,2.696
  Bottom Layer w0.3: v1(-77.432,8.125) -77.407,8.125 -74.994,5.712 v1(-74.969,5.712)
LO1_3V3: P2.7
LS_OE: R41.2 U1.87 U10.10 | length 28.1
  Top Layer w0.3: U1.87@-48.147,2.196 -45.491,2.196 -39.79,7.897 -35.395,7.897 -32.551,7.897 -31.636,8.811 -26.455,8.811 -25.182,7.538 U10.10@-23.362,7.538
LSM_SPI_CS: U1.142 U13.12 | length 6.3
  Top Layer w0.28: U13.12@-79.29,-2.712 -78.025,-2.712 -77.788,-2.949 -76.162,-2.949 -75.018,-1.804 U1.142@-73.597,-1.804
LSM_SPI_MISO: U1.140 U13.1 | length 5.9
  Top Layer w0.3: U13.1@-79.542,-0.804 U1.140@-73.597,-0.804
LSM_SPI_MOSI: U1.141 U13.14 | length 5.9
  Top Layer w0.28: U13.14@-79.29,-1.712 -78.323,-1.712 -77.915,-1.304 U1.141@-73.597,-1.304
LSM_SPI_SCK: U1.139 U13.13 | length 10.6
  Top Layer w0.28: U13.13@-79.29,-2.212 -76.95,-2.212 v1(-76.874,-2.136)
  Top Layer w0.3: U1.139@-73.597,-0.304 -71.974,-0.304 v1(-71.514,-0.765)
  Bottom Layer w0.3: v1(-76.874,-2.136) -72.886,-2.136 v1(-71.514,-0.765)
NetBT1_1: BT1.1 U1.6 | length 30.8
  Top Layer w0.3: v1(-77.178,-22.507) -75.883,-21.212 -74.054,-21.212 -71.59,-18.748 -69.457,-18.748 -69.122,-19.083 U1.6@-69.122,-20.779
  Bottom Layer w0.5: BT1.1@-81.598,-39.905 BT1.1@-81.598,-27.105 -81.414,-27.105 -81.045,-26.736 -81.045,-26.373 v1(-77.178,-22.507)
NetC1_1: C1.1 U1.9 X1.2 | length 9.3
  Top Layer w0.3: C1.1@-67.907,-29.3 -68.567,-28.64 -68.567,-27.642 X1.2@-68.723,-27.485 -68.441,-27.203 -68.441,-26.368 -67.622,-25.549 U1.9@-67.622,-20.779
NetC3_1: C3.1 U1.10 X1.1 | length 9.2
  Top Layer w0.3: U1.10@-67.122,-20.779 -67.122,-25.487 -66.197,-26.411 -66.197,-27.211 X1.1@-65.923,-27.485 -65.923,-28.738 C3.1@-66.485,-29.3
NetC6_1: C6.1 U1.29 X2.1 | length 14
  Top Layer w0.3: C6.1@-58.422,-32.464 -58.508,-32.378 -58.508,-30.806 X2.1@-58.593,-30.721 -59.694,-30.721 -60.059,-30.356 -60.059,-26.698 -57.622,-24.261 U1.29@-57.622,-20.779
NetC7_1: C7.1 U1.30 X2.3 | length 10.3
  Top Layer w0.3: U1.30@-57.122,-20.779 -57.122,-26.155 -56.393,-26.884 X2.3@-56.393,-28.721 -55.179,-28.721 -54.676,-29.224 C7.1@-54.649,-29.224 ; C7.1@-54.694,-29.269 C7.1@-54.649,-29.314
NetC33_1: C33.1 L2.2 U6.3 U6.6 | length 10.6
  Top Layer w1: U6.6@32.832,-58.518 U6.3@43.425,-58.518
NetC33_2: C33.2 D6.2 L4.1
NetC34_1: C34.1 C35.1 D6.1 L3.1 R17.1
NetC40_1: C40.1 U8.6 | length 2.1
  Top Layer w0.5: C40.1@-70.371,34.91 -70.271,34.91 -69.773,35.407 U8.6@-68.429,35.407
NetC40_2: C40.2 L5.1 U8.2 | length 10.3
  Top Layer w0.5: v1(-70.422,32.179) -70.397,32.205 -70.397,33.284 C40.2@-70.371,33.31
  Bottom Layer w0.5: v1(-70.422,32.179) -70.422,34.211 -68.314,36.319 -64.559,36.319 -64.402,36.163 v1(-64.402,36.015)
  other v1: -58.382,31.671 -59.957,32.459 -59.17,32.459 -58.408,32.459 -63.64,36.015 -64.402,36.624 -63.64,36.624
NetC48_1: C48.1 R7.2 R14.1 U8.4 | length 7.6
  Top Layer w0.5: C48.1@-72.2,32.967 R14.1@-72.2,36.37 -71.108,36.37 -70.171,37.307 U8.4@-68.429,37.307
NetC49_1: C49.1 U9.6 | length 2.4
  Top Layer w0.5: C49.1@-52.642,32.078 -52.542,32.078 -51.523,33.096 -51.523,33.693 -51.498,33.718 U9.6@-51.223,33.718
NetC49_2: C49.2 L6.1 U9.2 | length 8.9
  Top Layer w0.5: v3(-52.642,29.385) C49.2@-52.642,30.478
  Bottom Layer w0.5: v3(-52.642,29.385) -52.546,29.481 -52.546,29.887 -48.095,34.338 v1(-47.13,34.338)
  other v1: -46.368,34.338 -38.951,34.338 -38.189,34.338 -47.13,34.948 -46.368,34.948 -38.951,34.948 -38.164,34.948
NetC53_1: C53.1 R23.2 R29.1 U9.4 | length 7.6
  Top Layer w0.5: C53.1@-56.173,32.014 R23.2@-54.522,32.014 -54.553,32.046 -54.553,33.621 R29.1@-54.585,33.652 -54.585,33.752 -54.335,34.002 -54.235,34.002 -52.644,35.593 -51.248,35.593 U9.4@-51.223,35.618
NetC57_1: C57.1 CON1.1 L7.2 | length 6.6
  Top Layer w0.5: C57.1@15.558,-29.036 15.589,-29.006 22.012,-29.006 CON1.1@22.043,-28.975 ; CON1.1@21.929,-28.86 CON1.1@22.007,-28.782
NetC57_2: C57.2 U11.11 | length 2.1
  Top Layer w0.5: U11.11@12.076,-29.044 12.08,-29.04 14.155,-29.04 C57.2@14.158,-29.036
NetC68_2: C68.2 C74.1 U15.6 | length 6
  Top Layer w0.3: U15.6@-20.614,-35.411 -19.165,-35.411 v1(-18.047,-34.293)
  Bottom Layer w0.3: C68.2@-19.546,-35.791 C74.1@-19.546,-34.369 -19.508,-34.331 -18.085,-34.331 v1(-18.047,-34.293)
NetC73_1: C73.1 U15.4 X3.3 | length 10.2
  Top Layer w0.3: U15.4@-20.614,-36.411 -18.418,-36.411 -17.006,-37.823 -14.313,-37.823 -13.891,-37.4 -13.891,-36.479 X3.3@-13.837,-36.426 -12.231,-36.426 C73.1@-12.129,-36.325
NetC77_1: C77.1 U15.5 X3.1 | length 7.4
  Top Layer w0.3: U15.5@-20.614,-35.911 -18.37,-35.911 -16.712,-34.252 -15.864,-34.252 -15.781,-34.17 -15.781,-32.393 C77.1@-15.725,-32.337
NetD2_2: D2.2 F1.2
NetJ1_1: J1.1 R37.1 | length 2.5
  Bottom Layer w0.3: J1.1@-25.312,14.602 -25.312,14.538 -24.37,13.596 -24.37,12.63 R37.1@-24.37,12.496 ; R37.1@-24.236,12.63 R37.1@-24.204,12.598
NetL7_1: L7.1 R2.2 | length 2.1
  Top Layer w0.5: R2.2@15.57,-25.734 16.653,-26.818 16.855,-26.818 L7.1@17.105,-27.068
NetLED1_1: LED1.1 R25.2 | length 1.5
  Top Layer w0.5: LED1.1@-83.808,-8.232 -83.784,-8.208 -83.784,-6.783 R25.2@-83.76,-6.759
NetLED2_1: LED2.1 R26.2 | length 1.5
  Top Layer w0.5: R26.2@-42.888,9.967 LED2.1@-41.415,9.967
NetLED3_1: LED3.1 R27.2 | length 1.5
  Top Layer w0.5: R27.2@-47.664,9.957 -47.652,9.969 -46.202,9.969 LED3.1@-46.19,9.981
NetLED4_1: LED4.1 R28.2 | length 1.4
  Top Layer w0.3: LED4.1@-83.046,8.913 -83.04,8.907 R28.2@-83.04,7.471
NetP4_1: P4.1 U2.15 | length 13.8
  Top Layer w0.5: U2.15@-43.981,-52.104 -43.981,-58.804 -42.812,-59.972 -40.348,-59.972 -38.665,-61.655 P4.1@-38.665,-62.283
NetP4_2: P4.2 U2.16 | length 14.7
  Top Layer w0.5: U2.16@-42.711,-52.104 -39.301,-52.104 -36.665,-54.74 P4.2@-36.665,-62.283
NetP7_1: P7.1 U2.13 | length 10.9
  Top Layer w0.5: U2.13@-46.521,-52.104 -46.521,-60.1 -44.838,-61.783 P7.1@-44.838,-62.283
NetP7_2: P7.2 U2.14 | length 11.2
  Top Layer w0.5: U2.14@-45.251,-52.104 -45.251,-59.286 -42.838,-61.699 P7.2@-42.838,-62.283
NetP8_1: P8.1 U2.11 | length 11
  Top Layer w0.5: P8.1@-50.975,-62.283 -50.975,-60.54 -49.061,-58.626 U2.11@-49.061,-52.104
NetP8_2: P8.2 U2.12 | length 10.7
  Top Layer w0.5: P8.2@-48.975,-62.283 -48.975,-60.521 -47.791,-59.337 U2.12@-47.791,-52.104
NetP9_1: P9.1 U2.9 | length 14.1
  Top Layer w0.5: P9.1@-57.106,-62.283 -57.106,-54.885 -54.324,-52.104 U2.9@-51.601,-52.104
NetP9_2: P9.2 U2.10 | length 12.9
  Top Layer w0.5: P9.2@-55.106,-62.283 -55.106,-61.783 -52.253,-58.931 -51.016,-58.931 -50.331,-58.245 U2.10@-50.331,-52.104
NetP10_1: P10.1 R32.1 | length 2.8
  Top Layer w0.5: -83.379,-59.464 -83.339,-59.504 -83.339,-62.218 P10.1@-83.3,-62.258
NetP10_2: P10.2 U16.2 | length 13.9
  Top Layer w0.5: P10.2@-81.3,-62.258 -81.3,-60.461 -79.109,-58.27 -76.874,-58.27 -76.391,-57.788 U16.2@-76.391,-51.748
NetP11_1: P11.1 R34.1 | length 2.9
  Top Layer w0.5: P11.1@-77.162,-62.258 -77.026,-62.122 R34.1@-77.026,-59.464
NetP11_2: P11.2 U16.4 | length 11.1
  Top Layer w0.5: P11.2@-75.162,-62.258 -75.162,-61.758 -73.851,-60.447 U16.4@-73.851,-51.748
NetP12_1: P12.1 R62.1 | length 2.9
  Top Layer w0.5: R62.1@-71.108,-59.464 -71.036,-59.535 -71.036,-62.186 P12.1@-70.965,-62.258
NetP12_2: P12.2 U16.6 | length 11.5
  Top Layer w0.5: U16.6@-71.311,-51.748 -71.292,-51.767 -71.292,-57.502 -68.965,-59.829 P12.2@-68.965,-62.258
NetP13_1: P13.1 R64.1 | length 2.9
  Top Layer w0.5: R64.1@-65.037,-59.464 -64.945,-59.556 -64.945,-62.166 P13.1@-64.854,-62.258
NetP13_2: P13.2 U16.8 | length 15
  Top Layer w0.5: U16.8@-68.771,-51.748 -65.361,-51.748 -62.853,-54.257 P13.2@-62.853,-62.258
NetR4_2: R4.2 U1.171 | length 5.5
  Top Layer w0.3: R4.2@-77.689,-16.513 -77.636,-16.459 -77.636,-15.573 -77.407,-15.344 -75.731,-15.344 -74.77,-16.304 U1.171@-73.597,-16.304
NetR6_2: R6.2 R13.1 U8.5 | length 5.9
  Top Layer w0.4: R13.1@-68.974,39.571 R6.2@-67.463,39.571 -67.463,38.161 -67.095,37.793 -67.095,36.878 -67.585,36.388 -68.398,36.388 U8.5@-68.429,36.357
NetR8_2: R8.2 U1.120 | length 28.1
  Top Layer w0.3: R8.2@-80.757,24.178 -80.074,24.178 -77.686,21.791 -76.315,21.791 -66.383,11.859 -65.545,11.859 -64.91,11.224 -64.91,10.234 -65.622,9.522 U1.120@-65.622,4.671
NetR9_2: R9.2 U2.1 | length 2.5
  Top Layer w0.4: U2.1@-42.711,-46.504 -42.711,-44.416 R9.2@-42.442,-44.148
NetR10_2: R10.2 U2.3 | length 2.4
  Top Layer w0.4: R10.2@-45.287,-44.148 -45.269,-44.166 -45.269,-46.486 U2.3@-45.251,-46.504
NetR12_2: R12.2 U3.3 | length 2.2
  Top Layer w0.3: U3.3@-80.546,26.032 -80.546,25.757 -80.11,25.321 R12.2@-78.804,25.321
NetR14_2: R14.2 R15.1 | length 1.7
  Top Layer w0.5: R14.2@-73.8,36.37 R15.1@-73.8,38.047
NetR16_2: R16.2 U2.5 | length 2.5
  Top Layer w0.4: R16.2@-48.146,-44.148 -47.791,-44.503 U2.5@-47.791,-46.504
NetR17_2: R17.2 R19.1 U6.5 | length 23.3
  Top Layer w0.5: R19.1@24.549,-63.68 24.587,-63.642 R17.2@26.161,-63.642 ; R17.2@26.2,-63.604 26.3,-63.604 27.309,-64.614 27.666,-64.614 v1(27.724,-64.671)
  Top Layer w0.8: R17.2@26.161,-63.642 R17.2@26.2,-63.604 ; v1(40.957,-55.121) 40.96,-55.118 U6.5@43.425,-55.118
  Bottom Layer w0.5: v1(27.724,-64.671) 31.407,-64.671 v1(40.957,-55.121)
NetR21_2: R21.2 U2.7 | length 2.6
  Top Layer w0.4: R21.2@-51.002,-44.148 -50.331,-44.819 U2.7@-50.331,-46.504
NetR29_2: R29.2 R30.1 | length 2.4
  Top Layer w0.5: R29.2@-56.185,33.652 -55.938,33.899 -55.938,34.42 -55.492,34.866 -55.492,35.438 R30.1@-55.271,35.659
NetR32_2: R32.2 U16.1 | length 10.7
  Top Layer w0.5: R32.2@-82.487,-59.464 -82.487,-54.892 -79.343,-51.748 U16.1@-77.661,-51.748
NetR34_2: R34.2 U16.3 | length 7.9
  Top Layer w0.5: R34.2@-75.626,-59.464 -75.121,-58.959 U16.3@-75.121,-51.748
NetR46_2: R46.2 R51.1 U15.8 | length 6.6
  Top Layer w0.3: U15.8@-21.814,-34.711 -21.814,-33.742 -19.825,-31.753 R46.2@-19.825,-30.356 R51.1@-21.248,-30.356
NetR47_2: R47.2 R52.1 U15.7 | length 7
  Top Layer w0.3: U15.7@-21.314,-34.711 -21.314,-34.08 -18.403,-31.168 R47.2@-18.403,-30.356 R52.1@-16.98,-30.356